# Altium PCB RotatingDUTframe.PcbDoc
Units mil, origin at the board's own origin, x right, y up, seen from the top; angles counter-clockwise.
Board outline 3937.01 x 3937.01 mil, 2 copper layers (Top Layer, Bottom Layer), stack 62.192 mil thick; 21 components, 23 nets, 106 pads, 20 vias.
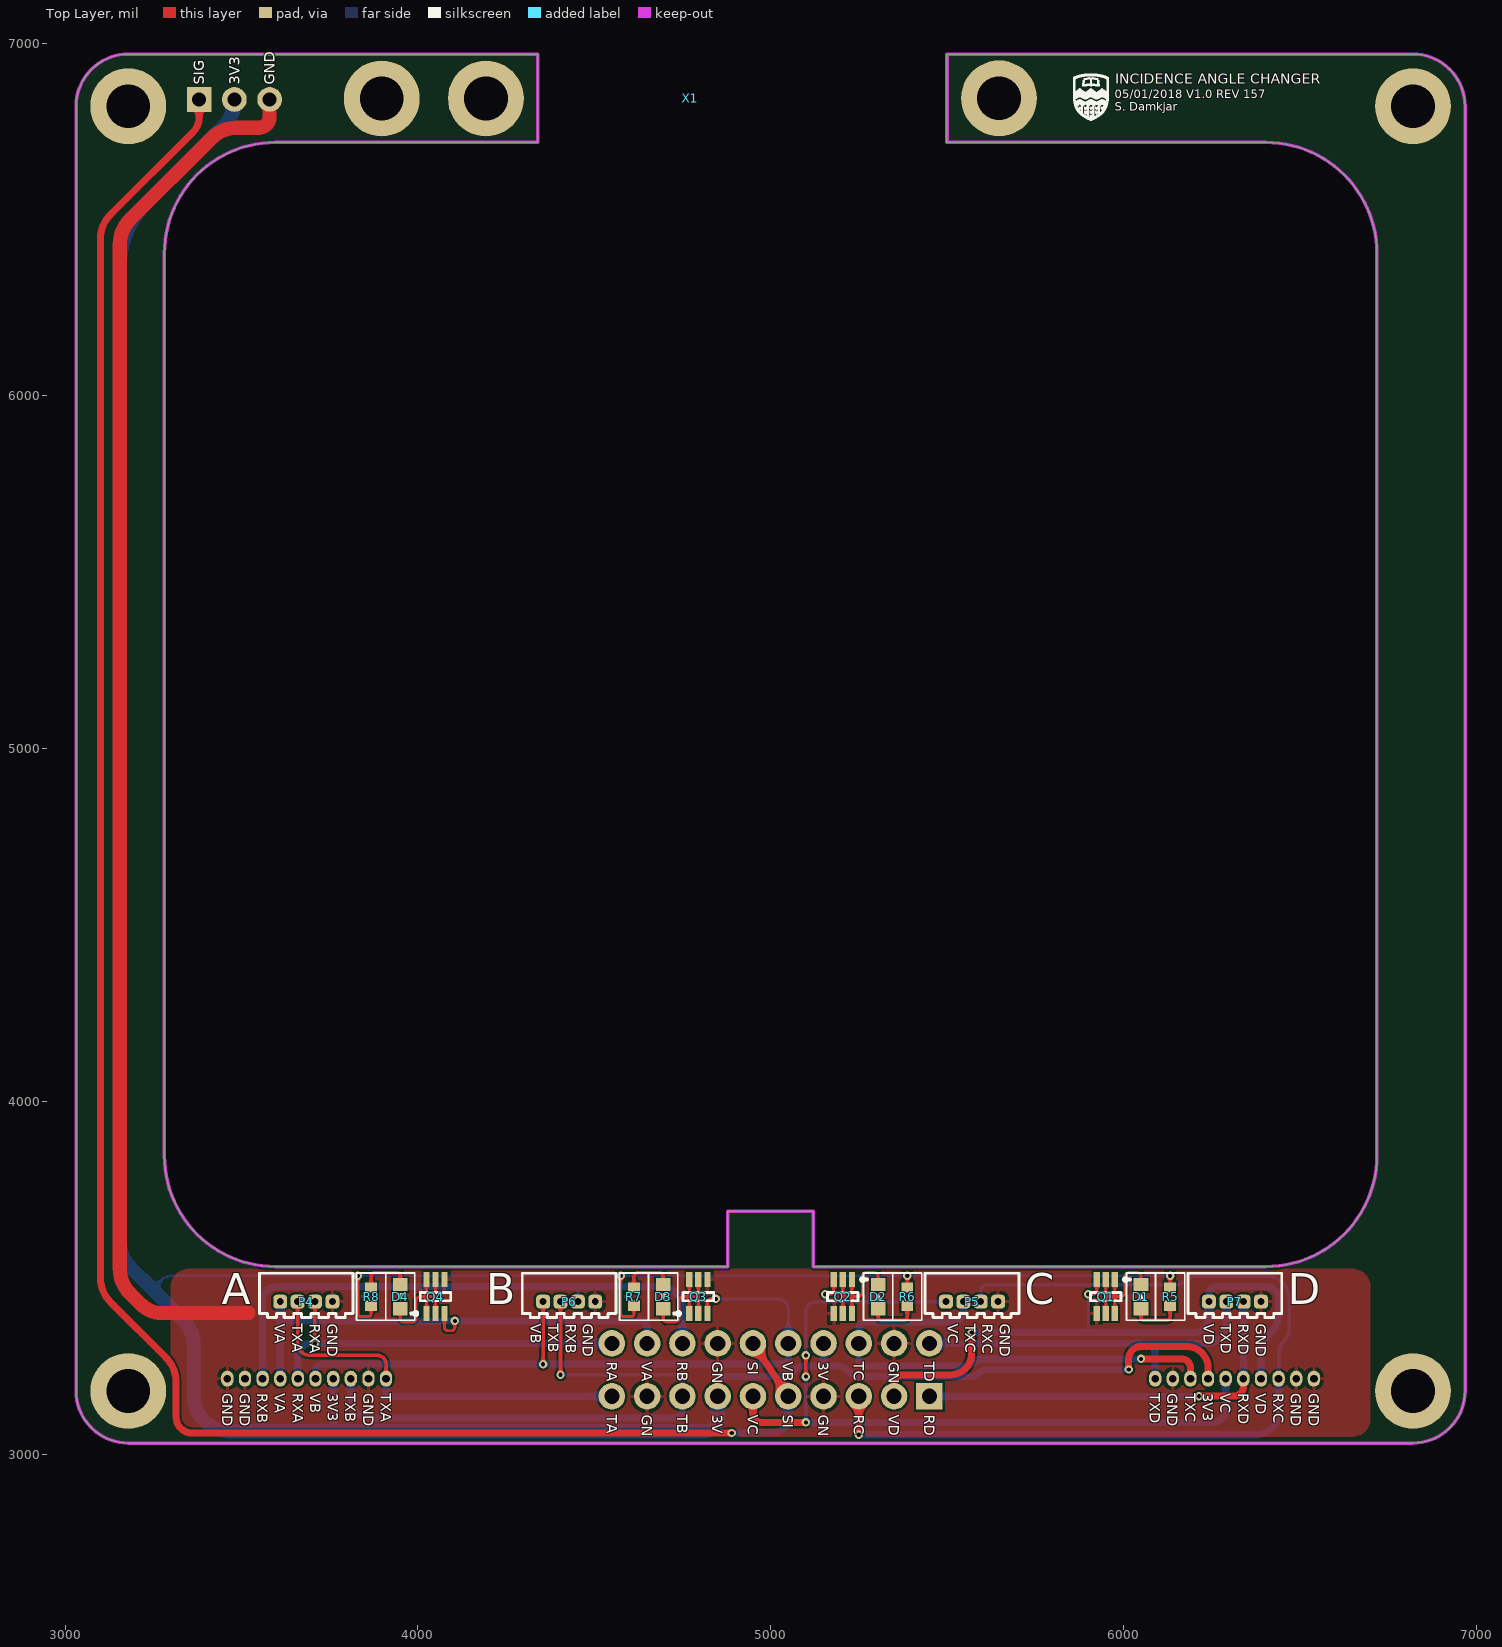
[diagram p0: Top Layer view]
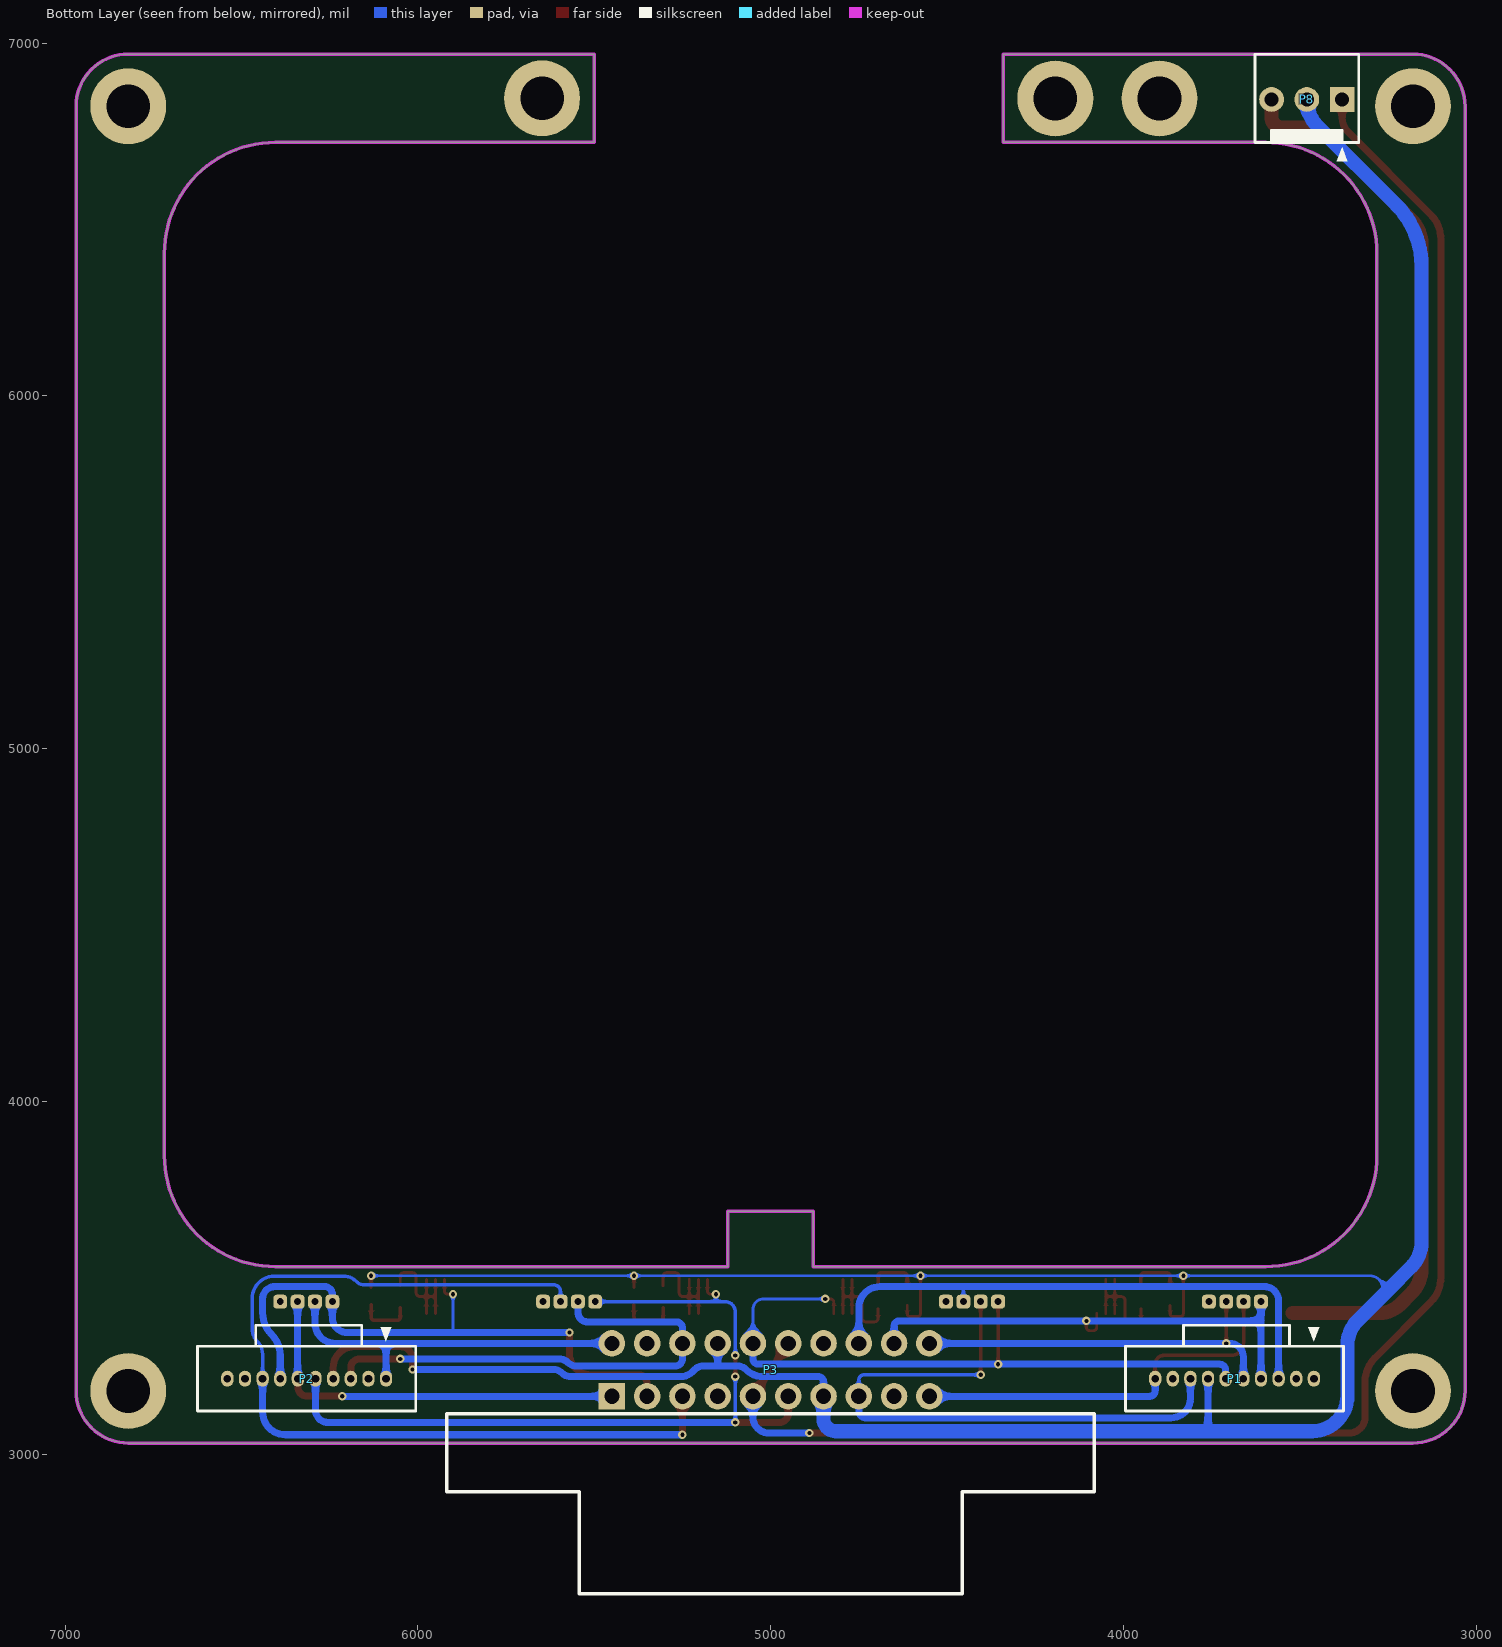
[diagram p1: Bottom Layer view, seen from below]

## Layer stack, top to bottom
Top Solder: solder mask 0.4, Solder Resist, Dk 3.5
Top Layer: signal copper 1.4
Dielectric 1: dielectric 59.392, FR-4, Dk 4.8
Bottom Layer: signal copper 1.4
Bottom Solder: solder mask 0.4, Solder Resist, Dk 3.5

## Board outline
3179.13,3031.5 cw(c3179.13,3179.13) 3031.5,3179.13 3031.5,6820.87 cw(c3179.13,6820.87) 3179.13,6968.5 4340.55,6968.5 4340.55,6718.5 3596.46,6718.5 ccw(c3596.46,6403.54) 3281.5,6403.54 3281.5,3846.46 ccw(c3596.46,3846.46) 3596.46,3531.5 4879.13,3531.5 4879.13,3688.98 5120.87,3688.98 5120.87,3531.5 6403.54,3531.5 ccw(c6403.54,3846.46) 6718.5,3846.46 6718.5,6403.54 ccw(c6403.54,6403.54) 6403.54,6718.5 5500,6718.5 5500,6968.5 6820.87,6968.5 cw(c6820.87,6820.87) 6968.5,6820.87 6968.5,3179.13 cw(c6820.87,3179.13) 6820.87,3031.5

## Design rules (kind name [scope] priority, off if disabled: settings)
AcuteAngle [All] p1: minimum=6.00000000000000E+0001 checktracksonly=FALSE
BoardOutlineClearance [All] p1: gap=7.87 ignorepadtopadclearanceinfootprint=FALSE
Clearance [All] p1: gap=6 ignorepadtopadclearanceinfootprint=FALSE except(0: Arc-Hole Track-Hole SMDPad-Hole THPad-Hole Via-Hole Fill-Hole Poly-Hole Region-Hole Text-Hole)
Clearance ClearanceTop [OnLayer('Component Side')] p2 off: gap=4 ignorepadtopadclearanceinfootprint=FALSE except(0: Arc-Hole Track-Hole SMDPad-Hole THPad-Hole Via-Hole Fill-Hole Poly-Hole Region-Hole Text-Hole)
Clearance ClearanceTop_1 [OnLayer('Signal Layer 1')] p3 off: gap=4 ignorepadtopadclearanceinfootprint=FALSE except(0: Arc-Hole Track-Hole SMDPad-Hole THPad-Hole Via-Hole Fill-Hole Poly-Hole Region-Hole Text-Hole)
Clearance ClearanceTop_2 [OnLayer('Signal Layer 2')] p4 off: gap=4 ignorepadtopadclearanceinfootprint=FALSE except(0: Arc-Hole Track-Hole SMDPad-Hole THPad-Hole Via-Hole Fill-Hole Poly-Hole Region-Hole Text-Hole)
Clearance ClearanceBottom [OnLayer('Solder Side')] p5 off: gap=4 ignorepadtopadclearanceinfootprint=FALSE except(0: Arc-Hole Track-Hole SMDPad-Hole THPad-Hole Via-Hole Fill-Hole Poly-Hole Region-Hole Text-Hole)
Height HeightTop [OnLayer('Component Side')] p1: minheight=0 maxheight=1000 prefheight=157.48
Height HeightBottom [OnLayer('Solder Side')] p2: minheight=0 maxheight=157.48 prefheight=157.48
HoleSize [All] p1: absolutevalues=TRUE maxlimit=255.91 minlimit=7.87 maxpercent=80.000 minpercent=20.000
MinimumAnnularRing [All] p1: minimumring=4
MinimumSolderMaskSliver [All] p1: minsoldermaskwidth=3.94
PolygonConnect PolygonConnect_1 [IsVia] p1: connectstyle=Direct reliefconductorwidth=10 reliefentries=4 polygonreliefangle="90 Angle" airgapwidth=10
PolygonConnect [All] p2: connectstyle=Relief reliefconductorwidth=10 reliefentries=4 polygonreliefangle="90 Angle" airgapwidth=10
RoutingVias [All] p1: holewidth=8 width=20 viastyle="Through Hole" minholewidth=11.81 minwidth=23.81 maxholewidth=28 maxwidth=50
SMDEntry [All] p1: side=TRUE corner=FALSE anyangle=FALSE
SMDNeckDown [All] p1: percent=90.000
SMDToCorner [All] p1: distance=0
SMDToPlane [All] p1: distance=0
SilkToSilkClearance [All] p1: silktosilkclearance=6
SilkToSolderMaskClearance [IsPad] p1: minsilkscreentomaskgap=5.12 clearancetoexposedcopper=TRUE
SolderMaskExpansion [All] p1: expansion=0
UnConnectedPin [All] p1:
Width [All] p1: maxlimit=100 minlimit=6 preferedwidth=10 checkconnectedcopper=TRUE
25 further rules are at their usual default settings.

## Components (designator, comment, footprint, x,y, rotation, side; value= is the part's Value field where it differs from the comment)
D1 "LED" WL-150060XS75000 6049.85,3446.77 r90 top value=GREEN
D2 "LED" WL-150060XS75000 5304.63,3446.77 r90 top value=GREEN
D3 "LED" WL-150060XS75000 4695.38,3446.77 r270 top value=GREEN
D4 "LED" WL-150060XS75000 3950.15,3446.77 r270 top value=GREEN
P1 "5-104071-1" TEC-5-104071-1 3459.99,3214.09 r0 bottom
P2 "5-104071-1" TEC-5-104071-1 6089.99,3214.09 r0 bottom
P3 "Header 10x2" SLN-EBC10MMBD 5450,3164.09 r180 bottom
P4 "Header 4" MOLX-530470410 3683.82,3450 r180 top
P5 "Header 4" MOLX-530470410 5570.96,3450 r180 top
P6 "Header 4" MOLX-530470410 4429.04,3450 r180 top
P7 "Header 4" MOLX-530470410 6316.19,3450 r180 top
P8 "Header 3" MOLX-22112032 3380,6840 r0 bottom
Q1 "SQ1470" VSH-SQ1470AEH 5950,3446.77 r270 top
Q2 "SQ1470" VSH-SQ1470AEH 5204.78,3446.77 r270 top
Q3 "SQ1470" VSH-SQ1470AEH 4795.22,3446.77 r90 top
Q4 "SQ1470" VSH-SQ1470AEH 4050,3446.77 r90 top
R5 "Res3" PANA-ERJ3EK 6132.53,3446.77 r90 top value=1k
R6 "Res3" PANA-ERJ3EK 5387.3,3446.77 r90 top value=1k
R7 "Res3" PANA-ERJ3EK 4612.7,3446.77 r270 top value=1k
R8 "Res3" PANA-ERJ3EK 3867.47,3446.77 r270 top value=1k
X1 "Servo" Servo 5000,6843.31 r0 top

## Footprints (in the part's own frame and the unit in brackets; to place one, negate y for a bottom-side part, rotate by r counter-clockwise, add the part's x,y. Pads: shape width x height; smd on the part's side, far side on the other; paste and mask are expansions set on the pad)
MOLX-22112032 [mil]
  rect 70x70 hole 40: 1(0,0)
  round 70 hole 40: 2(100,0) 3(200,0)
  silkscreen extent -47,-128 247,175, body extent -47,-128 247,122, height 420
MOLX-530470410 [mm]
  rrect50% 1x1 hole 0.5: 1(1.875,0.45) 2(0.625,0.45) 3(-0.625,0.45) 4(-1.875,0.45)
  silkscreen extent -3.37,-1.6 3.38,1.6, body extent -3.37,-1.6 3.38,1.6, height 4.2
PANA-ERJ3EK [mm] "Chip Resistor, 2-Leads, Body 1.60x0.85mm, IPC High Density"
  rect 0.75x0.85 smd: 1(-0.65,0) 2(0.65,0)
  silkscreen extent -1.7,-1.05 1.7,1.05, body extent -0.88,-0.48 0.87,0.48, height 0.55
Servo [mm]
  round 5.461 hole 3.15: 3(-28,-0.01) 3(-20.5,-0.01) 3(16.45,0)
  body extent -31.75,-3.76 31.75,39.42, height 11.9
SLN-EBC10MMBD [mil] "CONN EDGE DUAL FMALE 20POS 0.100"
  rect 75x75 hole 43: 1(0,0)
  round 75 hole 43: 2(0,150) 3(100,0) 4(100,150) 5(200,0) 6(200,150) 7(300,0) 8(300,150) 9(400,0) 10(400,150) 11(500,0) 12(500,150) 13(600,0) 14(600,150) 15(700,0) 16(700,150) 17(800,0) 18(800,150) 19(900,0) 20(900,150)
  silkscreen extent -468,-560 1368,-50, body extent -468,-560 1368,162, height 370
TEC-5-104071-1 [mil]
  oval 35x45 hole 22.01: 1(0,0) 2(50,0) 3(100,0) 4(150,0) 5(200,0) 6(250,0) 7(300,0) 8(350,0) 9(400,0) 10(450,0)
  silkscreen extent -84,-152 534,92, body extent -147,-152 597,92, height 390
VSH-SQ1470AEH [mm] "SOT23, 6-Leads, Body 2.00x2.10mm, Pitch 0.65mm, IPC Low Density"
  rect 1.1x0.45 smd: 1(-1.225,0.65) 1(-1.225,0) 1(1.225,0.65) 1(1.225,0) 2(-1.225,-0.65) 3(1.225,-0.65)
  silkscreen extent -1.35,-1.1 0.3,1.55, body extent -1.3,-1.1 1.3,1.1, height 1.1
WL-150060XS75000 [mm] "Chip Diode, 2-Leads, Body 1.60x0.80mm, IPC Low Density"
  rect 0.95x1.05 smd: 1(-0.875,0) 2(0.875,0)
  silkscreen extent -1.7,-1.05 1.7,1.05, body extent -0.8,-0.4 0.8,0.4, height 0.7

## Part data
D1 D2 D3 D4: library part 2, "LED GREEN CLEAR 0603 SMD", Manufacturer Part Number=150060GS75000, Supplier Part Number 1=732-4971-1-ND, Brightness=430mcd, LatestRevisionDate=08-Jul-2005, LatestRevisionNote="Mech Layer 1 removed.", PackageDescription="LED; 2 Leads", PackageReference=WL-150060XS75000, Part Number=2, Published=8-Jun-2000, Publisher="Altium Limited", Supplier 1=Digi-Key, Supplier Link=http://www.digikey.ca/product-search/en?keywords=732-4971-1-ND
P1 P2: library part 458, "CONN HEADER 10POS .050 VERT GOLD", Supplier Part Number 1=5-104071-1-ND, LatestRevisionDate=17-Jul-2002, LatestRevisionNote="Re-released for DXP Platform.", Manufacturer Part Number=5-104071-1, Part Number=458, Publisher="Altium Limited", Supplier 1=Digi-Key, Supplier Link=http://www.digikey.ca/product-search/en?keywords=5-104071-1-ND
P3: library part PP-SLN-00106, "CONN CARDEDGE MALE 20POS 0.100", Manufacturer Part Number=EBC10MMBD, Supplier Part Number 1=S7282-ND, Index=106, LatestRevisionDate=2018-03-22, LatestRevisionNote=..., Mounting Type="Through Hole", Number of Positions=20, Number of Rows=2, PackageDescription="CONN CARDEDGE MALE 20POS 0.100", PackageReference=SLN-EBC10MMBD, Part Number=PP-SLN-00106, Pitch="0.100\" (2.54mm)", Published=2018-03-22, Publisher=AlbertaSat, Supplier 1=Digi-key, Supplier Link=#https://www.digikey.ca/product-detail/en/sullins-connector-solutions/EBC10MMBD/S7282-ND/1922771#
P4 P5 P6 P7: library part 5, "CONN HEADER 4POS 1.25MM VERT TIN", Manufacturer Part Number=530470410, Supplier Part Number 1=WM1733-ND, LatestRevisionDate=17-Jul-2002, LatestRevisionNote="Re-released for DXP Platform.", PackageReference=MOLX-530470410, Part Number=5, Publisher="Altium Limited", Supplier 1=Digi-Key, Supplier Link=http://www.digikey.ca/product-search/en?keywords=WM1733-ND
P8: library part 33, "CONN HEADER 3POS .100 VERT GOLD", Manufacturer Part Number=22112032, Supplier Part Number 1=WM2701-ND, LatestRevisionDate=17-Jul-2002, LatestRevisionNote="Re-released for DXP Platform.", PackageReference=MOLX-22112032, Part Number=33, Publisher="Altium Limited", Supplier 1=Digi-Key, Supplier Link=http://www.digikey.ca/product-search/en?keywords=WM2701-ND
Q1 Q2 Q3 Q4: library part PQ-VSH-00227, "MOSFET N-CH 30V 2.8A SC70", Manufacturer Part Number=SQ1470AEH-T1_GE3, Supplier Part Number 1=SQ1470AEH-T1_GE3CT-ND, Applications=Automotive, Index=227, LatestRevisionDate=7/12/2017, LatestRevisionNote=..., PackageDescription="SOT23, 6-Leads, Body 2.00x2.10mm, Pitch 0.65mm, IPC Low Density", PackageReference=VSH-SOT363, PackageVersion=1995/1996, Part Number=PQ-VSH-00227, Published=7/12/2017, Publisher=AlbertaSat, Supplier 1=Digi-key, Supplier 2=Mouser, Supplier Link=#https://www.digikey.ca/product-detail/en/vishay-siliconix/SQ1470AEH-T1_GE3/SQ1470AEH-T1_GE3CT-ND/6595360#, Supplier Part Number 2=78-SQ1470AEH-T1_GE3
R5 R6 R7 R8: library part 15398, "RES SMD 1K OHM 1% 1/10W 0603", Manufacturer Part Number=ERJ-3EKF1001V, Power="0.1W, 1/10W", Supplier Part Number 1=P1.00KHCT-ND, Temperature Coefficient=±100ppm/°C, Tolerance=±1%, LatestRevisionDate=29-May-2009, LatestRevisionNote="IPC-7351 Footprint Added.", PackageDescription="Chip Resistor, 2-Leads, Body 1.60x0.80mm, IPC Low Density", PackageReference="0603 (1608 Metric)", Part Number=15398, Published=8-Jun-2000, Publisher="Altium Limited", Supplier 1=Digi-Key, Supplier Link=http://www.digikey.ca/product-search/en?keywords=P1.00KHCT-ND

## Free pads (board coordinates)
  round 215 hole 124.02: 3(3179.13,3179.13) 3(3179.13,6820.87) 3(6820.87,3179.13) 3(6820.87,6820.87)

## Via types
v1: diameter 23.81, hole 11.81, Top Layer to Bottom Layer, tented both sides, 20 vias

## Nets (pads, with @x,y where several pads share a name; then routed paths per layer and width w, separated by ;. In a path a pad name is that pad's centre, name@x,y a point inside that pad or via, vN(x,y) a via of type N, cw(c..) or ccw(c..) an arc to the next point about the centre after c; other vN are vias at no path point)
3V3: P1.7 P2.4 P3.8 P3.13 P8.2 R5.2 R6.2 R7.2 R8.2 | length 10600.1
  Top Layer w8: v1(3830,3505.7) 3830,3398.54 ccw(c3838.54,3398.54) 3838.54,3390 3860,3390 ccw(c3860,3397.47) 3867.47,3397.47 R8.2 ; v1(4575.22,3505.7) 4575.22,3398.54 ccw(c4583.77,3398.54) 4583.77,3390 4605.22,3390 ccw(c4605.22,3397.47) 4612.7,3397.47 R7.2 ; R6.2 v1(5387.3,3505.7) ; R5.2 v1(6132.53,3505.7)
  Top Layer w20: v1(6015,3240) 6015,3270 cw(c6050,3270) 6050,3305 6180,3305 cw(c6180,3245.01) 6239.99,3245.01 P2.4
  Bottom Layer w8: 3247.5,3467.5 3275,3495 cw(c3300.83,3469.17) 3300.83,3505.7 v1(3830,3505.7) v1(5387.3,3505.7) v1(6132.53,3505.7)
  Bottom Layer w20: 3759.99,3065 P1.7 ; P3.13 4850,3205 cw(c4865,3205) 4865,3220 5021.72,3220 ccw(c5021.72,3288.28) 5070,3240 cw(c5094.14,3215.86) 5094.14,3250 5190.86,3250 cw(c5190.86,3215.86) 5215,3240 5220.86,3234.14 ccw(c5255,3268.28) 5255,3220 5566.72,3220 ccw(c5566.72,3254.14) 5590.86,3230 cw(c5615,3205.86) 5615,3240 v1(6015,3240) ; 5150,3260 P3.8
  Bottom Layer w40: P8.2 3480,6836.42 cw(c3380,6836.42) 3450.71,6765.71 3227.42,6542.42 ccw(c3402.26,6367.58) 3155,6367.58 3155,3601.42 ccw(c3255,3601.42) 3184.29,3530.71 3247.5,3467.5 3335.71,3379.29 cw(c3265,3308.58) 3365,3308.58 3365,3165 ccw(c3465,3165) 3465,3065 3759.99,3065 4815,3065 ccw(c4815,3100) 4850,3100 P3.13
GND: P1.1 P1.2 P1.9 P2.2 P2.9 P2.10 P3.4 P3.7 P3.14 P3.17 P4.4 P5.4 P6.4 P7.4 P8.3 Q1.3 Q2.3 Q3.3 Q4.3 | length 3980.9
  Top Layer w40: 3215.25,3424.75 3184.29,3455.71 cw(c3255,3526.42) 3155,3526.42 3155,6428.58 cw(c3255,6428.58) 3184.29,6499.29 3415.71,6730.71 cw(c3486.42,6660) 3486.42,6760 3550,6760 ccw(c3550,6790) 3580,6790 P8.3 ; 3215.28,3424.72 ccw(c3275,3484.5) 3275,3400 3520,3400
NetD1_1: D1.1 R5.1 | length 153.1
  Top Layer w10: D1.1@6049.85,3414.32 6049.85,3387.85 ccw(c6057.96,3387.85) 6057.96,3379.74 6122.96,3379.74 ccw(c6122.96,3389.3) 6132.53,3389.3 R5.1@6132.53,3423.18
NetD1_2: D1.2 Q1.1 | length 384.3
  Top Layer w8: Q1.1@5950,3398.54 5950,3446.77 ; Q1.1@5950,3495 5950,3446.77 ; Q1.1@5975.59,3398.54 5975.59,3446.77 ; Q1.1@5975.59,3495 5975.59,3446.77 ; D1.2@6049.85,3477.22 D1.2 6049.85,3504.7 ccw(c6040,3504.7) 6040,3514.54 6015,3514.54 ccw(c6015,3504.54) 6005,3504.54 6005,3458.54 cw(c5993.23,3458.54) 5993.23,3446.77 5975.59,3446.77 ; 5950,3446.77 5975.59,3446.77
NetD2_1: D2.1 R6.1 | length 153.1
  Top Layer w10: D2.1@5304.63,3414.32 5304.63,3387.85 ccw(c5312.74,3387.85) 5312.74,3379.74 5377.74,3379.74 ccw(c5377.74,3389.3) 5387.3,3389.3 R6.1@5387.3,3423.18
NetD2_2: D2.2 Q2.1 | length 384.3
  Top Layer w8: Q2.1@5204.78,3398.54 5204.78,3446.77 ; Q2.1@5204.78,3495 5204.78,3446.77 ; Q2.1@5230.37,3398.54 5230.37,3446.77 ; Q2.1@5230.37,3495 5230.37,3446.77 ; D2.2@5304.63,3477.22 D2.2 5304.63,3504.7 ccw(c5294.78,3504.7) 5294.78,3514.54 5269.78,3514.54 ccw(c5269.78,3504.54) 5259.78,3504.54 5259.78,3458.54 cw(c5248.01,3458.54) 5248.01,3446.77 5230.37,3446.77 ; 5204.78,3446.77 5230.37,3446.77
NetD3_1: D3.1 R7.1 | length 153.1
  Top Layer w10: R7.1@4612.7,3470.36 4612.7,3504.24 cw(c4622.26,3504.24) 4622.26,3513.81 4687.26,3513.81 cw(c4687.26,3505.7) 4695.38,3505.7 D3.1@4695.38,3479.22
NetD3_2: D3.2 Q3.1 | length 388.3
  Top Layer w8: D3.2 4695.38,3384.85 ccw(c4705.22,3384.85) 4705.22,3375 4730.22,3375 ccw(c4730.22,3385) 4740.22,3385 4740.22,3435 cw(c4752,3435) 4752,3446.77 4769.63,3446.77 ; Q3.1@4769.63,3398.54 4769.63,3446.77 ; Q3.1@4769.63,3495 4769.63,3446.77 ; Q3.1@4795.22,3398.54 4795.22,3446.77 ; Q3.1@4795.22,3495 4795.22,3446.77 ; 4769.63,3446.77 4795.22,3446.77
NetD4_1: D4.1 R8.1 | length 153.1
  Top Layer w10: R8.1@3867.47,3470.36 3867.47,3504.24 cw(c3877.04,3504.24) 3877.04,3513.81 3942.04,3513.81 cw(c3942.04,3505.7) 3950.15,3505.7 D4.1@3950.15,3479.22
NetD4_2: D4.2 Q4.1 | length 388.3
  Top Layer w8: D4.2 3950.15,3384.85 ccw(c3960,3384.85) 3960,3375 3985,3375 ccw(c3985,3385) 3995,3385 3995,3435 cw(c4006.77,3435) 4006.77,3446.77 4024.41,3446.77 ; Q4.1@4024.41,3398.54 4024.41,3446.77 ; Q4.1@4024.41,3495 4024.41,3446.77 ; Q4.1@4050,3398.54 4050,3446.77 ; Q4.1@4050,3495 4050,3446.77 ; 4024.41,3446.77 4050,3446.77
NetP1_3: P1.3 P3.16 P6.3 | length 1612.4
  Bottom Layer w10: P6.3 4453.65,3473.65 cw(c4455,3473.65) 4455,3475
  Bottom Layer w20: P1.3 3560,3435 cw(c3600,3435) 3600,3475 4455,3475 4690,3475 cw(c4690,3415) 4750,3415 P3.16
NetP1_5: P1.5 P3.20 P4.3 | length 1091.9
  Top Layer w10: v1(3708.42,3314.09) P4.3
  Bottom Layer w20: P1.5 3659.99,3276.16 cw(c3697.92,3276.16) 3697.92,3314.09 v1(3708.42,3314.09) P3.20
NetP1_8: P1.8 P3.15 P6.2 | length 1687.3
  Top Layer w10: v1(4404.43,3225) P6.2
  Bottom Layer w10: v1(4404.43,3225) 4735,3225 cw(c4735,3210) 4750,3210 P3.15
  Bottom Layer w20: P1.8 3809.99,3157.6 ccw(c3864.59,3157.6) 3864.59,3103 4729.63,3103 ccw(c4729.63,3123.37) 4750,3123.37 P3.15
NetP1_10: P1.10 P3.19 P4.2 | length 1126.5
  Top Layer w10: P4.2 3659.21,3315.49 ccw(c3694.69,3315.49) 3694.69,3280 3885,3280 cw(c3885,3255.01) 3909.99,3255.01 P1.10
  Bottom Layer w20: P1.10 3909.99,3179.27 ccw(c3925.16,3179.27) 3925.16,3164.09 P3.19
NetP2_1: P2.1 P3.2 P7.2 | length 1035
  Bottom Layer w20: P3.2 6089.99,3314.09 ; P2.1 6089.99,3314.09 ; P7.2 6291.58,3371.74 cw(c6233.93,3371.74) 6233.93,3314.09 6089.99,3314.09
NetP2_3: P2.3 P3.6 P5.2 | length 1441.4
  Top Layer w20: v1(6050,3270) 6165.01,3270 cw(c6165.01,3245.02) 6189.99,3245.02 P2.3
  Bottom Layer w20: P5.2 5546.35,3402.63 cw(c5518.73,3402.63) 5518.73,3375 5267.07,3375 ccw(c5267.07,3357.93) 5250,3357.93 P3.6 5250,3270 ccw(c5270,3270) 5270,3250 5550.86,3250 ccw(c5550.86,3284.14) 5575,3260 cw(c5599.14,3235.86) 5599.14,3270 v1(6050,3270)
NetP2_6: P2.6 P3.1 P7.3 | length 1147.5
  Top Layer w20: v1(6214.09,3164.09) ccw(c6214.09,3165) 6215,3165 6315,3165 ccw(c6315,3189.99) 6339.99,3189.99 P2.6
  Bottom Layer w20: P3.1 v1(6214.09,3164.09) ; P2.6 ccw(c6339.99,3214.9) 6340.8,3214.9 P7.3
NetP2_8: P2.8 P3.5 P5.3 | length 2622
  Top Layer w20: v1(5250,3055) P3.5
  Bottom Layer w10: P5.3 5595.57,3460.57 cw(c5615,3460.57) 5615,3480 6150.86,3480 ccw(c6150.86,3514.14) 6175,3490 cw(c6211.21,3453.79) 6211.21,3505 6405,3505 cw(c6405,3440) 6470,3440 6470,3356.21 cw(c6418.79,3356.21) 6455,3320 ccw(c6491.24,3283.76) 6439.99,3283.76 P2.8
  Bottom Layer w20: v1(5250,3055) 6375.52,3055 ccw(c6375.52,3119.47) 6439.99,3119.47 P2.8
NetP3_9: P3.9 P3.12 P8.1 | length 5950.5
  Top Layer w20: P8.1 3380,6788.06 cw(c3324.33,6788.06) 3363.7,6748.7 3129.29,6514.29 ccw(c3200,6443.58) 3100,6443.58 3100,3501.42 ccw(c3200,3501.42) 3129.29,3430.71 3285.71,3274.29 cw(c3215,3203.58) 3315,3203.58 3315,3105 ccw(c3360,3105) 3360,3060 v1(4890,3060) ; P3.12 P3.9
  Bottom Layer w20: v1(4890,3060) 5005,3060 ccw(c5005,3105) 5050,3105 P3.9
VA: P1.4 P3.18 P4.1 Q4.2 | length 1422
  Top Layer w8: Q4.2 4075.59,3359.41 ccw(c4085,3359.41) 4085,3350 4095,3350 ccw(c4095,3360) 4105,3360 v1(4105,3377.95)
  Bottom Layer w20: P4.1@3601.18,3432.29 P4.1 3609.99,3377.95 ; P1.4 3609.99,3377.95 ; P3.18 4650,3362.95 ccw(c4635,3362.95) 4635,3377.95 3609.99,3377.95
VB: P1.6 P3.10 P6.1 Q3.2 | length 1983.3
  Top Layer w8: Q3.2 4820.81,3430.81 cw(c4830,3430.81) 4830,3440 v1(4845,3440)
  Top Layer w10: v1(4355.21,3255) P6.1
  Bottom Layer w8: v1(4845,3440) 5020,3440 cw(c5020,3410) 5050,3410 P3.10
  Bottom Layer w20: P1.6 3709.99,3237.91 cw(c3727.08,3237.91) 3727.08,3255 v1(4355.21,3255) 5035,3255 ccw(c5035,3270) 5050,3270 P3.10
VC: P2.5 P3.11 P5.1 Q2.2 | length 2322.2
  Top Layer w8: v1(5155,3453.54) 5170,3453.54 ccw(c5170,3462.73) 5179.19,3462.73 Q2.2
  Top Layer w10: v1(5100,3220) v1(5100,3280)
  Top Layer w20: P3.11 4950,3115 ccw(c4975,3115) 4975,3090 v1(5100,3090)
  Bottom Layer w8: 5155,3432.29 v1(5155,3453.54)
  Bottom Layer w10: v1(5100,3090) v1(5100,3220) ; v1(5100,3280) 5100,3402.93 cw(c5129.36,3402.93) 5129.36,3432.29 5155,3432.29 P5.1
  Bottom Layer w20: v1(5100,3090) 6255,3090 ccw(c6255,3124.99) 6289.99,3124.99 P2.5
VD: P2.7 P3.3 P7.1 Q1.2 | length 1766.7
  Top Layer w8: v1(5900.22,3453.54) 5915.22,3453.54 ccw(c5915.22,3462.73) 5924.41,3462.73 Q1.2
  Top Layer w20: P3.3 5350,3200 cw(c5375,3200) 5375,3225 5510,3225 ccw(c5510,3285) 5570,3285 v1(5570,3345)
  Bottom Layer w8: 5900,3345 5900.22,3345.22 v1(5900.22,3453.54)
  Bottom Layer w20: v1(5570,3345) 5900,3345 6200.05,3345 ccw(c6200.05,3387.32) 6242.36,3387.32 P7.1 6242.36,3453.62 cw(c6263.74,3453.62) 6263.74,3475 6405,3475 cw(c6405,3440) 6440,3440 6440,3400.36 cw(c6354.64,3400.36) 6415,3340 ccw(c6475.38,3279.62) 6389.99,3279.62 P2.7
pads on no net: X1.3

## Polygon pours and split planes (outlines as drawn)
GND on Top Layer "Top Layer-GND" (solid, remove dead copper, pour order 0): 3350,3050 cw(c3350,3100) 3300,3100 3300,3475 cw(c3350,3475) 3350,3525 6650,3525 cw(c6650,3475) 6700,3475 6700,3100 cw(c6650,3100) 6650,3050

## Keep-outs
Keep-Out Layer:
  the board outline again, w10

## Silkscreen, mask and mechanical layers (free items; w line width, h text height)
Top Overlay:
  drawing of 1860 lines, arcs and shapes, not listed
  text "SIG" at 3395,6882 h30 r90
  text "3V3" at 3495,6882 h30 r90
  text "GND" at 3595,6882 h30 r90
  text "INCIDENCE ANGLE CHANGER" at 5976.34,6874.79 h50
  text "05/01/2018 V1.0 REV 157" at 5976.1,6835.22 h40
  text "S. Damkjar" at 5976.1,6800.22 h40
  text "A" at 3443.81,3395 h150
  text "B" at 4194.04,3395 h150
  text "C" at 5720.96,3395 h150
  text "D" at 6466.19,3395 h150
  text "VA" at 3594.99,3370.29 h30 r270
  text "TXA" at 3644.21,3370.29 h30 r270
  text "RXA" at 3693.42,3370.29 h30 r270
  text "GND" at 3742.64,3370.29 h30 r270
  text "VB" at 4320.21,3370.29 h30 r270
  text "TXB" at 4369.43,3370.29 h30 r270
  text "RXB" at 4418.65,3370.29 h30 r270
  text "GND" at 4467.86,3370.29 h30 r270
  text "VC" at 5502.14,3370.29 h30 r270
  text "TXC" at 5551.35,3370.29 h30 r270
  text "RXC" at 5600.57,3370.29 h30 r270
  text "GND" at 5649.79,3370.29 h30 r270
  text "VD" at 6227.36,3370.29 h30 r270
  text "TXD" at 6276.58,3370.29 h30 r270
  text "RXD" at 6325.8,3370.29 h30 r270
  text "GND" at 6375.01,3370.29 h30 r270
  text "RA" at 4535,3262.09 h30 r270
  text "VA" at 4635,3262.09 h30 r270
  text "RB" at 4735,3262.09 h30 r270
  text "GN" at 4835,3262.09 h30 r270
  text "SI" at 4935,3262.09 h30 r270
  text "VB" at 5035,3262.09 h30 r270
  text "3V" at 5135,3262.09 h30 r270
  text "TC" at 5235,3262.09 h30 r270
  text "GN" at 5335,3262.09 h30 r270
  text "TD" at 5435,3262.09 h30 r270
  text "GND" at 3444.99,3172.09 h30 r270
  text "GND" at 3494.99,3172.09 h30 r270
  text "RXB" at 3544.99,3172.09 h30 r270
  text "VA" at 3594.99,3172.09 h30 r270
  text "RXA" at 3644.99,3172.09 h30 r270
  text "VB" at 3694.99,3172.09 h30 r270
  text "3V3" at 3744.99,3172.09 h30 r270
  text "TXB" at 3794.99,3172.09 h30 r270
  text "GND" at 3844.99,3172.09 h30 r270
  text "TXA" at 3894.99,3172.09 h30 r270
  text "TXD" at 6074.99,3172.09 h30 r270
  text "GND" at 6124.99,3172.09 h30 r270
  text "TXC" at 6174.99,3172.09 h30 r270
  text "3V3" at 6224.99,3172.09 h30 r270
  text "VC" at 6274.99,3172.09 h30 r270
  text "RXD" at 6324.99,3172.09 h30 r270
  text "VD" at 6374.99,3172.09 h30 r270
  text "RXC" at 6424.99,3172.09 h30 r270
  text "GND" at 6474.99,3172.09 h30 r270
  text "GND" at 6524.99,3172.09 h30 r270
  text "TA" at 4535,3112.09 h30 r270
  text "GN" at 4635,3112.09 h30 r270
  text "TB" at 4735,3112.09 h30 r270
  text "3V" at 4835,3112.09 h30 r270
  text "VC" at 4935,3112.09 h30 r270
  text "SI" at 5035,3112.09 h30 r270
  text "GN" at 5135,3112.09 h30 r270
  text "RC" at 5235,3112.09 h30 r270
  text "VD" at 5335,3112.09 h30 r270
  text "RD" at 5435,3112.09 h30 r270